# Altium PCB 2015_PerfServos.PcbDoc
Units mil, origin at the board's own origin, x right, y up, seen from the top; angles counter-clockwise.
Board outline 955 x 1895 mil, 4 copper layers (1-TOP, 2-Signal, 3-GND, 4-BOT); 26 components, 20 nets, 101 pads, 33 vias.
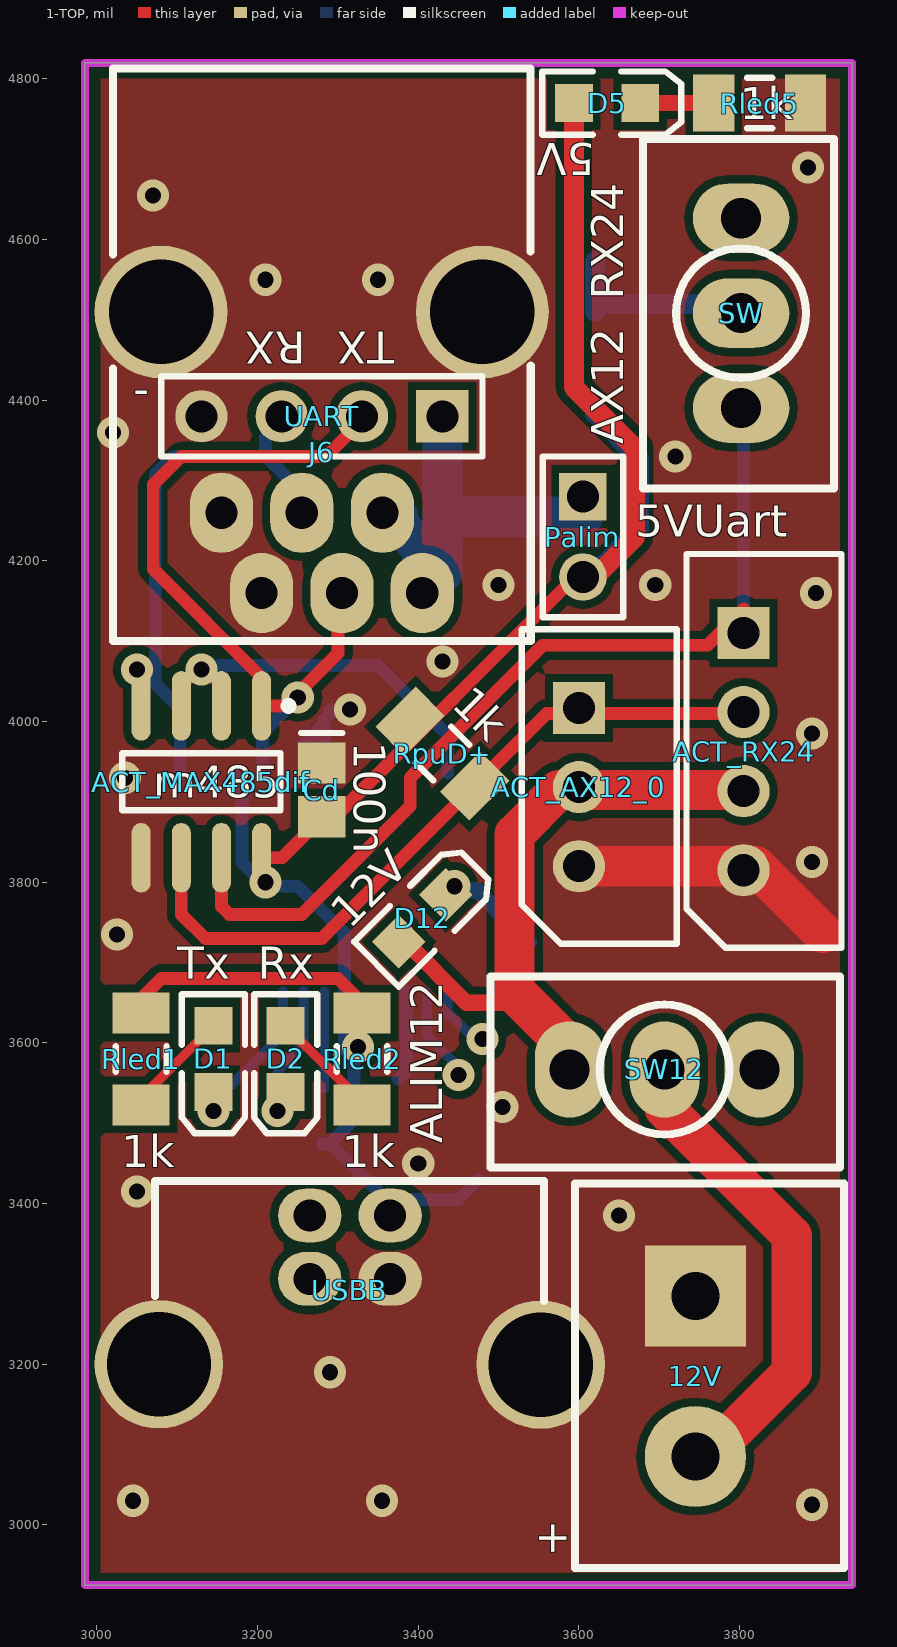
[diagram p0: 1-TOP view]
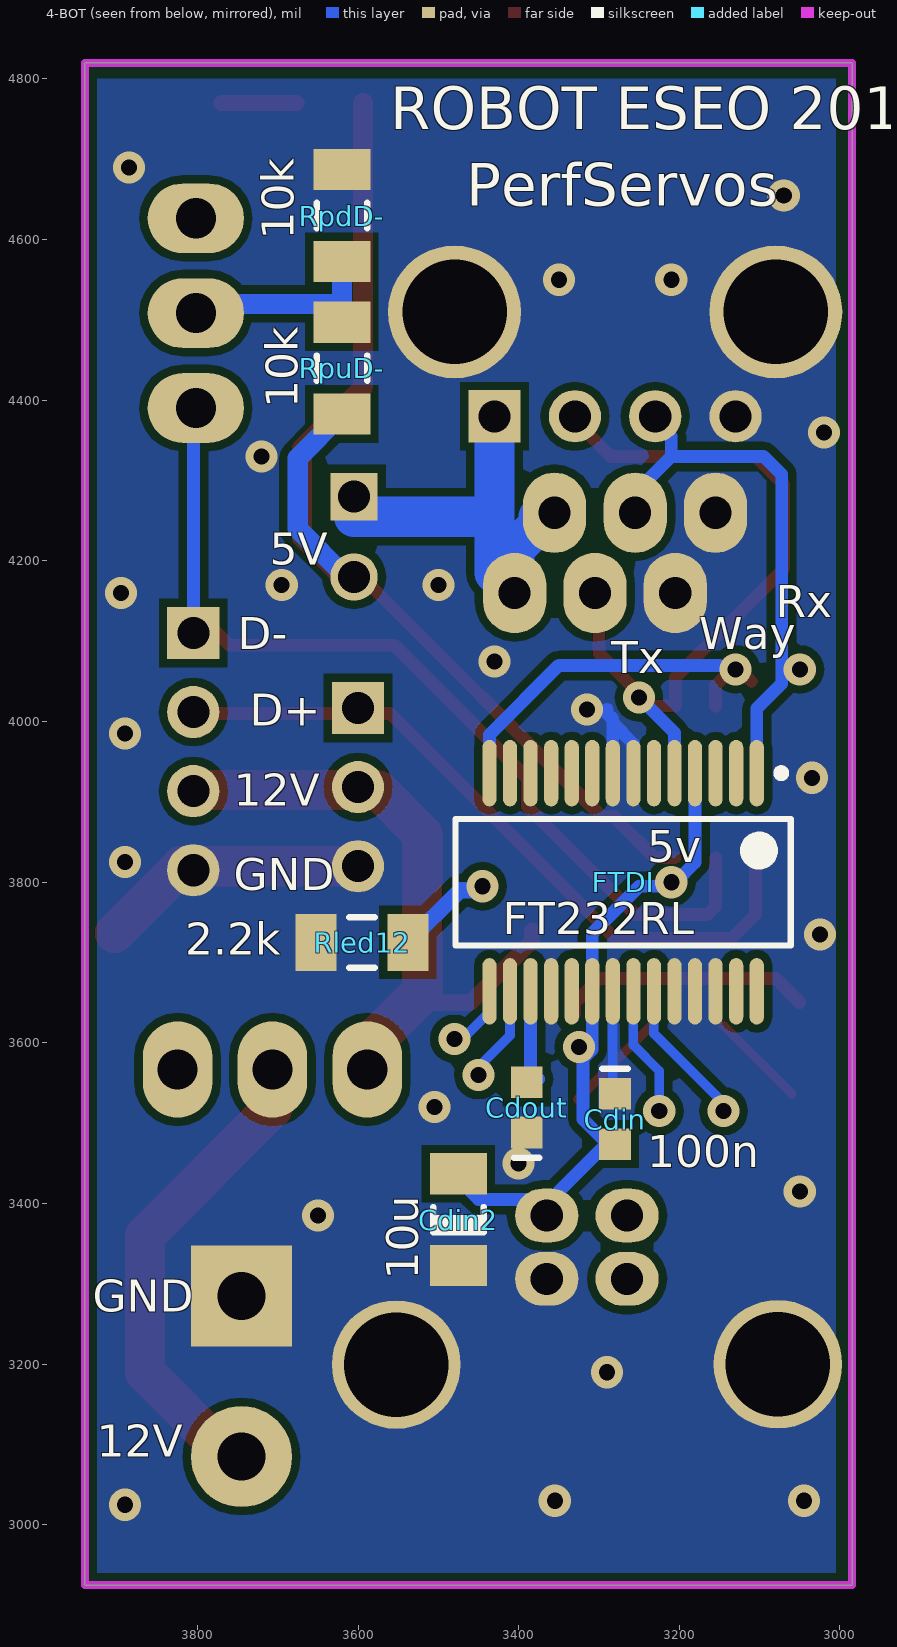
[diagram p1: 4-BOT view, seen from below]
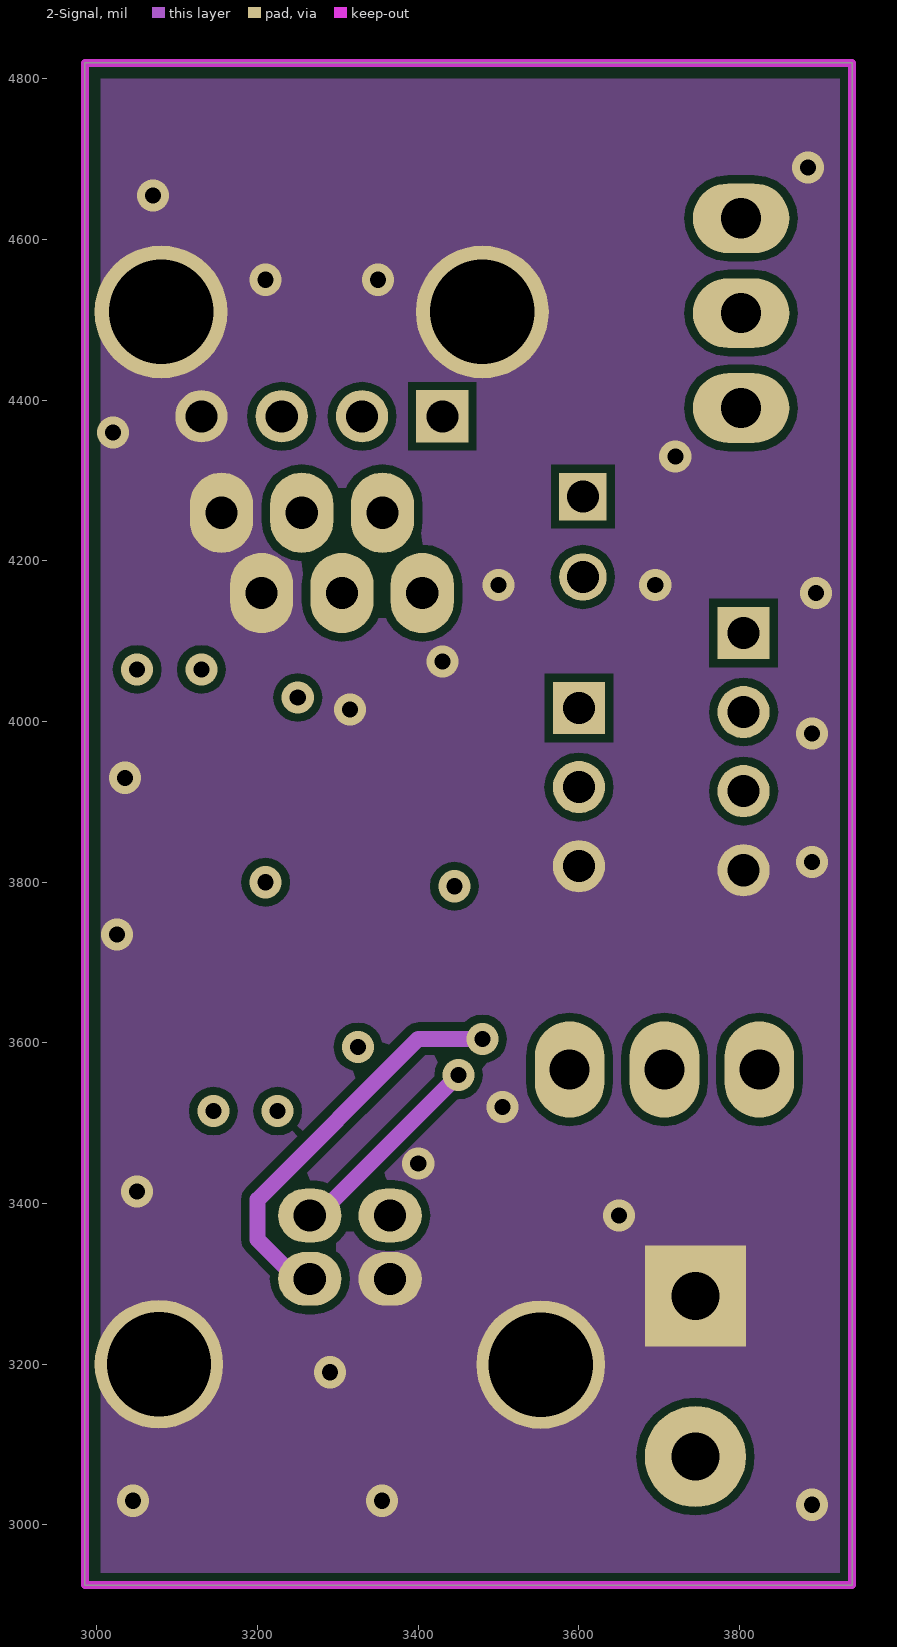
[diagram p2: 2-Signal]
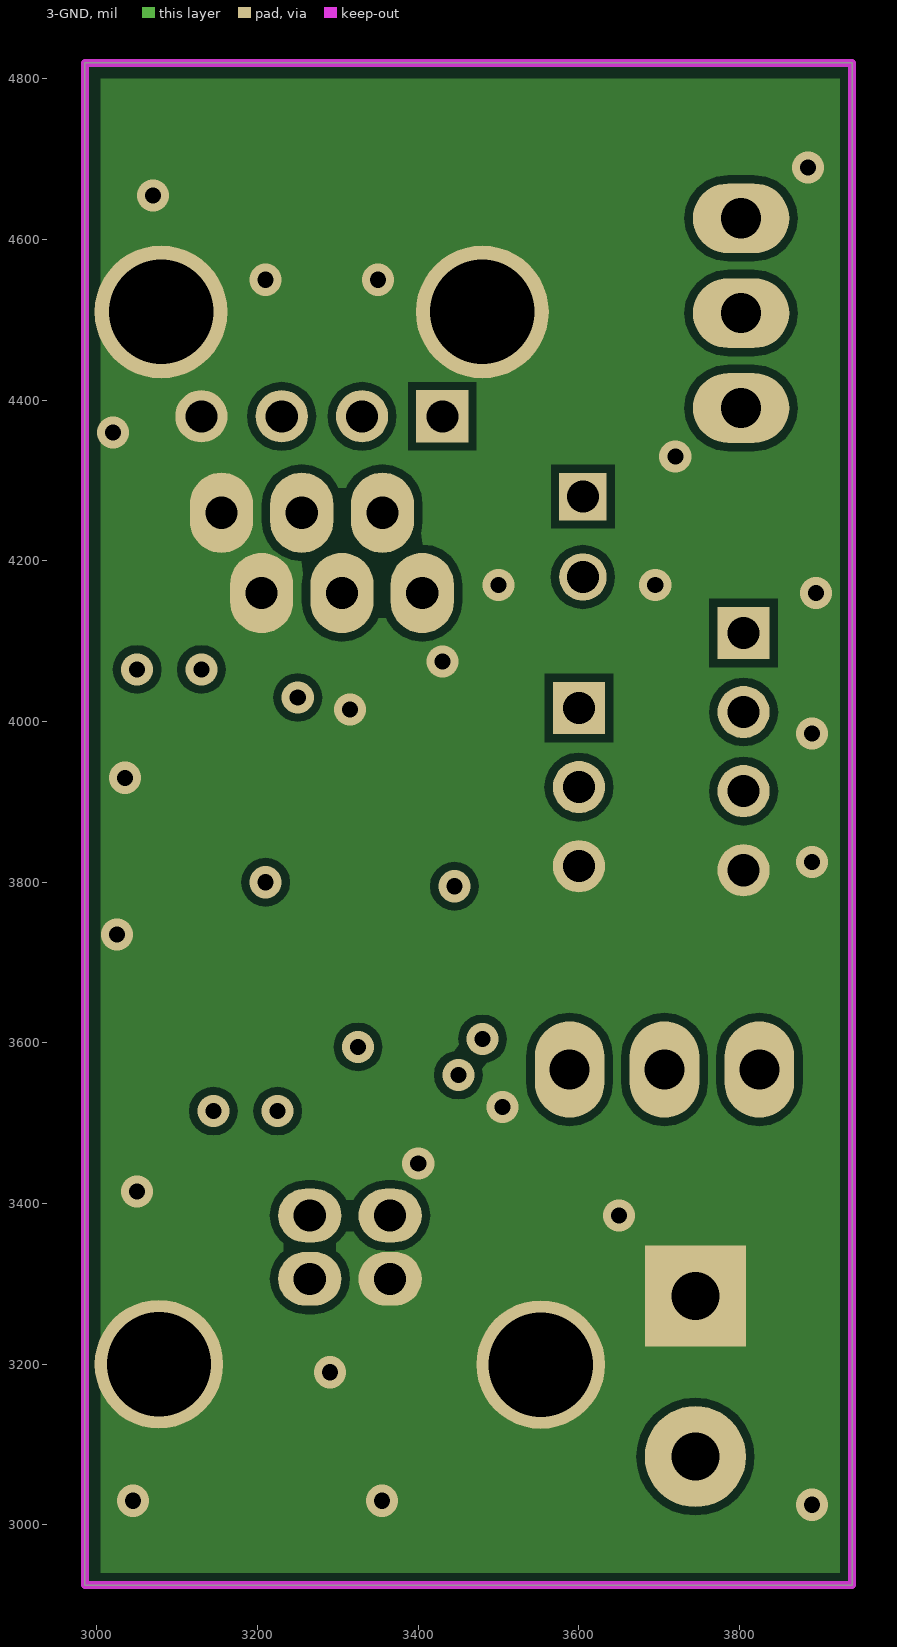
[diagram p3: 3-GND]
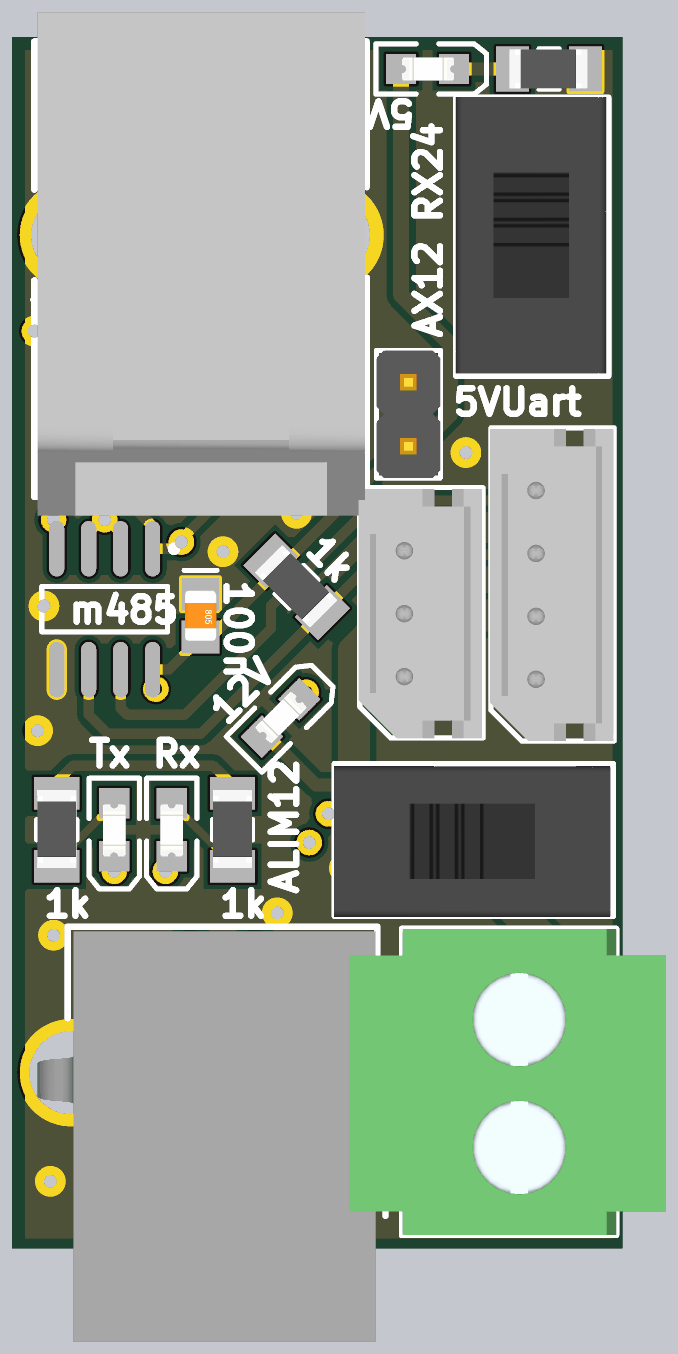
[diagram p4: 3D render of the assembled board from above, using the file's embedded part models]
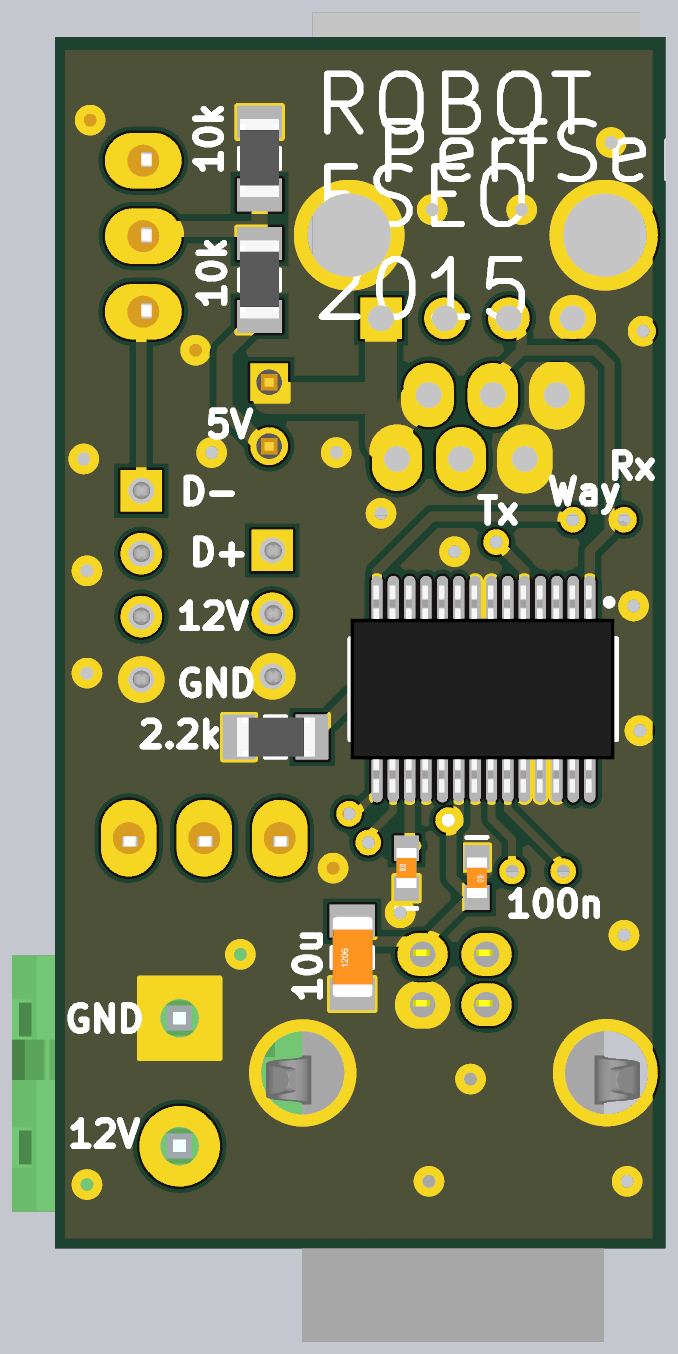
[diagram p5: 3D render of the assembled board from below, using the file's embedded part models]

## Layer stack, top to bottom
Top Solder: solder mask 0.4, Solder Resist, Dk 3.5
1-TOP: signal copper 1.4
Dielectric1: core 12.6, FR-4, Dk 4.8
2-Signal: signal copper 1.4
Dielectric2: prepreg 12.6, FR-4, Dk 4.8
3-GND: signal copper 1.4
Dielectric3: core 12.6, FR-4, Dk 4.8
4-BOT: signal copper 1.4
Bottom Solder: solder mask 0.4, Solder Resist, Dk 3.5

## Board outline
2985,2925 2985,4820 3940,4820 3940,2925

## Design rules (kind name [scope] priority, off if disabled: settings)
Clearance Clearance_1 [InNamedPolygon('4_GND') Or  InNamedPolygon('1_GND') Or  InNamedPolygon('3_GND') Or  InNamedPolygon('2_GND')] p1: gap=10
Clearance [All] p2: gap=7
Height [All] p1: minheight=0 maxheight=5000 prefheight=500
HoleSize [All] p1: absolutevalues=TRUE maxlimit=200 minlimit=1 maxpercent=80.000 minpercent=20.000
PolygonConnect [All] p1: connectstyle=Direct reliefconductorwidth=10 reliefentries=4 polygonreliefangle="90 Angle" airgapwidth=10
RoomDefinition 2015_PerfServos [InComponentClass('2015_PerfServos')] p1: confinementstyle=ConfineIn formatcopy=TRUE lockcomponents=FALSE outline 4600,2000 4000,2000 4000,2330 4600,2330
RoutingVias [All] p1: holewidth=28 width=50 viastyle="Through Hole" minholewidth=28 minwidth=50 maxholewidth=28 maxwidth=50
SilkToSolderMaskClearance SilkscreenOverComponentPads [IsPad] p1: minsilkscreentomaskgap=10 clearancetoexposedcopper=TRUE
SolderMaskExpansion [All] p1: expansion=4
Width [All] p1: maxlimit=100 minlimit=12 preferedwidth=16
26 further rules are at their usual default settings.

## Components (designator, comment, footprint, x,y, rotation, side; value= is the part's Value field where it differs from the comment)
12V "BORNIER2" BORNIER_2V_5.08MM 3745,3085 r90 top
ACT_AX12_0 "MOLEX 22-03-5035" MOLEX3_2.5MM 3600,3820 r90 top
ACT_MAX485dif "MAX485CPA+_DIP8" SO8_N 3130,3925 r270 top
ACT_RX24 "MOLEX 22-03-5045" MOLEX4_2.5MM 3805,3815 r90 top
Cd "100nF" C0805_N 3280,3915 r270 top
Cdin "100nF" C0603_N 3280,3505 r270 bottom
Cdin2 "10uF" C1206_N 3475,3380 r90 bottom
Cdout "100nF" C0603_N 3390,3520 r90 bottom
D1 "LED" LED_0805 3145,3580 r270 top
D2 "LED" LED_0805 3235,3580 r270 top
D5 "LED" LED_0805 3635,4770 r0 top
D12 "LED" LED_0805 3405,3755 r45 top
FTDI "IC_FT232RL" SSOP28_N 3270,3800 r270 bottom
J6 "UART" RJ11_6/6 3205,4160 r90 top
Palim "Jump" HDR1X2 3605,4280 r270 top
Rled1 "1K" R1206_N 3055,3580 r90 top
Rled2 "1K" R1206_N 3330,3580 r90 top
Rled5 "2,2k" R1206_N 3825,4770 r180 top
Rled12 "2,2k" R1206_N 3595,3725 r180 bottom
RpdD- "10k" R1206_N 3620,4630 r90 bottom
RpuD+ "10k" R1206_N 3430,3960 r135 top
RpuD- "10k" R1206_N 3620,4440 r90 bottom
SW "" "SW_UNIPOL_DROIT - Ebay - SPDT - 11x6x5" 3920,4725 r180 top
SW12 "" "SW_UNIPOL_DROIT - Ebay - SPDT - 11x6x5" 3490,3685 r270 top
UART "BARRETTE4" HDR1X4 3430,4380 r180 top
USBB "USB_B" USB_B_COUDE 3265,3385 r0 top

## Footprints (in the part's own frame and the unit in brackets; to place one, negate y for a bottom-side part, rotate by r counter-clockwise, add the part's x,y. Pads: shape width x height; smd on the part's side, far side on the other; paste and mask are expansions set on the pad)
BORNIER_2V_5.08MM [mm] "Connector; Header; 2 Position; screw terminal blocks, Pin Spacing=5.08mm"
  rect 3.2x3.2 hole 1.524: 1(5.08,0)
  round 3.2 hole 1.524: 2(0,0)
  silkscreen extent -3.53,-4.7 8.64,3.81, body extent -3.53,-6.68 8.63,5.92, height 29.9
C0603_N [mm] "Chip Capacitor, Body 1.6x0.8mm, IPC Medium Density"
  rect 1x1 smd: 1(-0.8,0) 2(0.787,0)
  silkscreen extent -1.6,-0.4 -1.6,0.4, body extent -0.8,-0.39 0.8,0.41, height 0.32
C0805_N [mm] "Chip Capacitor, Body 2.0x1.3mm, IPC Medium Density"
  rect 1.3x1.5 smd: 1(-0.85,0) 2(0.85,0)
  silkscreen extent -1.8,-0.65 -1.8,0.65, body extent -0.99,-0.63 1.01,0.63, height 0.8
C1206_N [mm] "Chip Capacitor, Body 3.2x1.6mm, IPC Medium Density"
  rect 1.3x1.8 smd: 1(-1.45,0) 2(1.45,0)
  silkscreen extent -0.4,-0.8 0.4,0.8, body extent -1.57,-0.81 1.63,0.79, height 1.02
HDR1X2 [mm]
  rect 1.5x1.5 hole 1.016: 1(0,0)
  round 1.5 hole 1.016: 2(2.54,0)
  silkscreen extent -1.27,-1.27 3.81,1.27, body extent -1.27,-1.27 3.81,1.27, height 10.1
HDR1X4 [mil] "Connector; Header; 4 Position"
  rect 65x65 hole 40: 1(0,0)
  round 65 hole 40: 2(100,0) 3(200,0) 4(300,0)
  silkscreen extent -50,-50 350,50
LED_0805 [mm] "SM LED; 2 Flat Leads"
  rect 1.2x1.2 smd: 1(-1.05,0) 2(1.05,0)
  silkscreen extent -2.05,-1 2.35,1, body extent -1.05,-0.64 1.06,0.64, height 1.2
MOLEX3_2.5MM [mil] "Ref Molex : 22-03-5035 - 3 voies - 2.5mm"
  rect 65x65 hole 40: 1(196.85,0)
  round 65 hole 40: 2(98.43,0) 3(0,0)
  silkscreen extent -96,-122 295,71, body extent -97,-120 293,73, height 233
MOLEX4_2.5MM [mil] "Ref Molex : 22-03-5045 - 4 voies - 2.5mm"
  rect 65x65 hole 40: 1(295.28,0)
  round 65 hole 40: 2(196.85,0) 3(98.43,0) 4(0,0)
  silkscreen extent -96,-122 394,71, body extent -96,-121 392,72, height 233
R1206_N [mm] "Chip Resistor, Body 3.2x1.6mm, IPC Medium Density"
  rect 1.3x1.8 smd: 1(-1.45,0) 2(1.45,0)
  silkscreen extent -0.4,-0.8 0.4,0.8, body extent -1.68,-0.87 1.68,0.87, height 0.71
RJ11_6/6 [mm] "Connector; RJ11; 6P/6C; Low Profil; Right Angle; Pin Spacing=2.54mm"
  oval 2.54x2 hole 1.016: 1(0,-5.08) 2(2.54,-3.82) 3(0,-2.54) 4(2.54,-1.27) 5(0,0) 6(2.54,1.27)
  round 4.2 hole 3.302: FIX1(8.89,3.18) FIX2(8.89,-6.98)
  silkscreen extent -1.51,-8.51 16.59,4.7, body extent -2.25,-8.43 17.75,4.57, height 16
SO8_N [mm] "SOIC, 8-Leads, Body 4.9x3.9mm, Pitch 1.27mm, IPC Medium Density"
  oval 2.2x0.6 smd: 1(-2.4,1.905) 2(-2.4,0.635) 3(-2.4,-0.635) 4(-2.4,-1.905) 5(2.4,-1.905) 6(2.4,-0.635) 7(2.4,0.635) 8(2.4,1.905)
  silkscreen extent -2.52,-2.5 0.9,2.88, body extent -2,-2.5 2,2.5, height 1.75
SSOP28_N [mm] "SOP, 28-Leads, Body 10.2x5.3mm, Pitch 0.65mm, IPC Medium Density"
  oval 2.1x0.45 smd: 1(-3.45,4.225) 2(-3.45,3.575) 3(-3.45,2.925) 4(-3.45,2.275) 5(-3.45,1.625) 6(-3.45,0.975) 7(-3.45,0.325) 8(-3.45,-0.325) 9(-3.45,-0.975) 10(-3.45,-1.625) 11(-3.45,-2.275) 12(-3.45,-2.925) 13(-3.45,-3.575) 14(-3.45,-4.225) 15(3.45,-4.225) 16(3.45,-3.575) 17(3.45,-2.925) 18(3.45,-2.275) 19(3.45,-1.625) 20(3.45,-0.975) 21(3.45,-0.325) 22(3.45,0.325) 23(3.45,0.975) 24(3.45,1.625) 25(3.45,2.275) 26(3.45,2.925) 27(3.45,3.575) 28(3.45,4.225)
  silkscreen extent -3.57,-5.3 2,5.3, body extent -4.11,-5.3 4.11,5.3, height 1.99
"SW_UNIPOL_DROIT - Ebay - SPDT - 11x6x5" [mm] "SW_UNIPOL_DROIT - Ebay - SPDT - 11x6x5"
  oval 3.048x2.2 hole 1.27: COMMON1(3,5.5) NC1(3,8.5) NO1(3,2.5)
  silkscreen extent 0.06,0 6.1,11.05, body extent 0.13,-0.04 6.13,10.96, height 8
USB_B_COUDE [mm] "Connector; USB; type B; 4 Position; Pin Spacing=2.54mm/12.07mm"
  oval 2x1.7 hole 1.016: 1(2.54,0) 2(0,0) 3(0,-2) 4(2.54,-2)
  round 4.064 hole 3.302: FIX1(-4.77,-4.7) FIX2(7.3,-4.71)
  silkscreen extent -4.9,-2.7 7.4,1.1, body extent -6.1,-15.39 8.76,0.91, height 10.75

## Part data
12V: "Terminal blocks, 2 pins, pitch=5mm"
ACT_AX12_0: library part BARRETTE3, "Header, 3-Pin"
ACT_MAX485dif: "EMETTEUR/RECEPTEUR FAIBLE PUISSANCE DE LIAISONS RS422/RS485 - DIP8"
ACT_RX24: library part BARRETTE4, "Header, 4-Pin"
Cd: library part Condensateur, "Capacitor"
Cdin Cdin2 Cdout: library part Capacitor, "Capacitor"
D1 D2 D5 D12: "Typical LED"
FTDI: "FT232R USB UART"
J6: library part CONNECTEUR_RJ12
Palim: library part "Jumper SIP2.54", "Jumper SIP2.54"
Rled1 Rled2 Rled5 Rled12 RpdD- RpuD+ RpuD-: library part Resistor, "Resistor"
SW SW12: library part "SW SPDT- APEM Série 523x", "Switch unipolaire a levier"
UART: "Header, 4-Pin"

## Via types
v1: diameter 40, hole 20, 1-TOP to 4-BOT, 33 vias

## Nets (pads, with @x,y where several pads share a name; then routed paths per layer and width w, separated by ;. In a path a pad name is that pad's centre, name@x,y a point inside that pad or via, vN(x,y) a via of type N, cw(c..) or ccw(c..) an arc to the next point about the centre after c; other vN are vias at no path point)
5V: ACT_MAX485dif.8 Cd.2 Cdin2.2 Cdin.2 D5.1 FTDI.4 FTDI.20 Palim.2 Rled1.2 Rled2.2 RpuD+.2 RpuD-.1 USBB.1 | length 2534.1
  1-TOP w16: Rled1.2@3050,3650 3080,3680 3300,3680 3330,3650 Rled2.2 ; ACT_MAX485dif.8 3230.51,3830.51 Cd.2@3275,3875 ; Cd.2 3296.54,3881.54 3595,4180 Palim.2 Palim.2@3615,4180
  1-TOP w25: D5.1 3593.66,4416.34 3670,4340 3670,4230 Palim.2@3620,4180
  4-BOT w16: FTDI.4 3180.43,3824.57 v1@3205,3800 ; v1@3215,3795 3250,3795 3308.39,3736.61 FTDI.20 3308.39,3591.61 3320,3580 3320,3505 Cdin.2@3290,3475 ; Cdin.2 3291,3474 3360,3405 3450,3405 Cdin2.2@3475,3430
  4-BOT w25: Palim.2@3615,4180 3675,4240 3675,4327.91 RpuD-.1
  other v1: 3325,3595 3210,3800
12V: ACT_AX12_0.2 ACT_RX24.3 D12.1 SW12.NO1 | length 894.9
  1-TOP w20: D12.1@3383.66,3740 3383.66,3726.34 3460,3650 3510,3650 SW12.NO1@3580,3580
  1-TOP w50: SW12.NO1 3588.43,3596.57 3520,3665 3520,3860 3575,3915 ACT_RX24.3@3800,3915
12VIN: 12V.2 SW12.COMMON1 | length 576.9
  1-TOP w50: SW12.COMMON1 3706.54,3518.46 3865,3360 3865,3190 12V.2@3770,3095
D+: FTDI.15 USBB.3 | length 570.8
  2-Signal w20: USBB.3@3250,3305 3200,3355 3200,3405 3400,3605 v1(3480,3605)
  4-BOT w12: FTDI.15 3436.34,3638.66 v1@3480,3595
D-: FTDI.16 USBB.2 | length 343.8
  2-Signal w20: USBB.2@3280,3390 v1(3450,3560)
  4-BOT w12: FTDI.16 3410.75,3609.25 v1@3445,3575
GND: 12V.1 ACT_AX12_0.3 ACT_MAX485dif.5 ACT_RX24.4 Cd.1 Cdin2.1 Cdin.1 Cdout.1 FTDI.7 FTDI.8 FTDI.18 FTDI.21 FTDI.24 FTDI.25 FTDI.26 J6.5 J6.6 J6.FIX1 J6.FIX2 Rled5.1 Rled12.1 RpdD-.2 UART.4 USBB.4 USBB.FIX1 USBB.FIX2 | length 613.5
  1-TOP w50: ACT_AX12_0.3 3820,3820 3903,3737
  4-BOT w12: Cdin.1@3282.8,3542.8 FTDI.21
  4-BOT w16: FTDI.7 3257.2,3972.2 3282.8,3997.8 ; FTDI.8 3282.8,3997.8 ; 3290,4015 3290,4010 3282.8,4002.8 3282.8,3997.8
  other v1: 3890,3025 3045,3030 3355,3030 3290,3190 3650,3385 3050,3415 3400,3450 3505,3520 3025,3735 3890,3825 3035,3930 3890,3985 3315,4015 3430,4075 3895,4160 3500,4170 3695,4170 3720,4330 3020,4360 3210,4550 3350,4550 3070,4655 3885,4690
LED_RX: D2.2 FTDI.22 | length 157.5
  4-BOT w12: v1@3225,3520 3225,3565 3257.2,3597.2 FTDI.22
  other v1: 3225,3515
LED_TX: D1.2 FTDI.23 | length 175
  4-BOT w12: v1@3145,3525 3231.61,3611.61 FTDI.23
  other v1: 3145,3515
MAX_RX: ACT_MAX485dif.4 FTDI.1 J6.4 UART.3 | length 634.2
  4-BOT w16: FTDI.1 3103.66,4016.34 3072.5,4047.5 3072.5,4307.5 3095,4330 3210,4330 ; UART.3@3230,4375 3210,4355 3210,4330 ; J6.4@3245,4295 3210,4330
  other v1: 3050,4065
MAX_SENS: ACT_MAX485dif.2 ACT_MAX485dif.3 FTDI.14 | length 450.8
  1-TOP w16: ACT_MAX485dif.3@3110,4050 3120,4060 3140,4060 3155,4045 ACT_MAX485dif.2
  4-BOT w16: 3150,4070 3350,4070 3436.34,3983.66 FTDI.14
  other v1: 3130,4065
MAX_TX: ACT_MAX485dif.1 FTDI.5 J6.3 UART.2 | length 927
  1-TOP w16: J6.3@3300,4160 3300,4085 3234.49,4019.49 ACT_MAX485dif.1 3205,4055 3070,4190 3070,4295 3105,4330 3285,4330 UART.2@3325,4370
  4-BOT w16: FTDI.5 3206.02,3986.02 v1(3250,4030)
MAXD+: ACT_AX12_0.1 ACT_MAX485dif.6 ACT_RX24.2 RpuD+.1 | length 903.9
  1-TOP w16: ACT_MAX485dif.6 3105,3760 3135,3730 3280,3730 3560,4010 ACT_RX24.2@3810,4010
MAXD-: ACT_MAX485dif.7 ACT_RX24.1 SW.NC1 | length 1152.6
  1-TOP w16: ACT_MAX485dif.7 3155,3770 3165,3760 3255,3760 3390,3895 3390,3930 3555,4095 3760,4095 ACT_RX24.1@3805,4140
  4-BOT w16: ACT_RX24.1@3805,4140 SW.NC1@3805,4400
NetCdout_2: Cdout.2 FTDI.17 | length 113.4
  4-BOT w16: Cdout.2@3375,3555 3385.16,3565.16 FTDI.17
NetD1_1: D1.1 Rled1.1 | length 120.2
  1-TOP w12: Rled1.1@3060,3536.34 D1.1
NetD2_1: D2.1 Rled2.1 | length 129.2
  1-TOP w12: D2.1 Rled2.1@3326.34,3530
NetD5_2: D5.2 Rled5.2 | length 93.7
  1-TOP w20: D5.2 Rled5.2@3770,4770
NetD12_2: D12.2 Rled12.2 | length 114.8
  4-BOT w20: v1@3450,3790 3472.91,3790 Rled12.2
  other v1: 3445,3795
NetRpdD-_1: RpdD-.1 RpuD-.2 SW.COMMON1 | length 247.1
  4-BOT w25: RpdD-.1 3620,4510 3630,4520 SW.COMMON1@3800,4520
VDD_CARTE: J6.1 J6.2 Palim.1 UART.1 | length 507.8
  4-BOT w50: J6.2@3360,4255 J6.2@3365,4250 ; J6.2@3370,4255 J6.2@3375,4255 ; J6.2@3375,4245 3405,4215 J6.1 ; J6.1@3410,4165 3430,4185 3430,4255 ; UART.1 3430,4255 ; Palim.1@3605,4255 3430,4255
pads on no net: FTDI.2 FTDI.3 FTDI.6 FTDI.9 FTDI.10 FTDI.11 FTDI.12 FTDI.13 FTDI.19 FTDI.27 FTDI.28 SW12.NC1 SW.NO1

## Polygon pours and split planes (outlines as drawn)
GND on 4-BOT "4_GND" (solid, pour order 8): 3005,4800 3925,4800 3925,2940 3005,2940
GND on 3-GND "3_GND" (solid, pour order 9): 3005,4800 3925,4800 3925,2940 3005,2940
GND on 2-Signal "2_GND" (solid, pour order 10): 3005,4800 3925,4800 3925,2940 3005,2940
GND on 1-TOP "1_GND" (solid, pour order 11): 3005,4800 3925,4800 3925,2940 3005,2940

## Keep-outs
Keep-Out Layer:
  the board outline again, w10

## Silkscreen, mask and mechanical layers (free items; w line width, h text height)
Top Overlay:
  text "1k" at 3800,4750 h40
  text "5V" at 3620,4720 h40 r180
  text "RX24" at 3655,4525 h40 r90
  text "RX" at 3260,4485 h40 r180
  text "TX" at 3370,4485 h40 r180
  text "-" at 3065,4425 h40 r180
  text "AX12" at 3655,4345 h40 r90
  text "5VUart" at 3670,4230 h40
  text "1k" at 3440,4020 h40 r315
  text "100n" at 3320,3975 h40 r270
  text "m485" at 3070,3905 h40
  text "12V" at 3315,3740 h40 r45
  text "Tx" at 3100,3680 h40
  text "Rx" at 3200,3680 h40
  text "ALIM12" at 3430,3475 h40 r90
  text "1k" at 3030,3445 h40
  text "1k" at 3305,3445 h40
  text "+" at 3585,2960 h40 r90
Bottom Overlay:
  text "ROBOT ESEO 2015" at 3560,4720 h90
  text "PerfServos" at 3465,4625 h90
  text "10k" at 3680,4600 h40 r270
  text "10k" at 3675,4390 h40 r270
  text "5V" at 3710,4195 h40
  text "Rx" at 3080,4130 h40
  text "Way" at 3175,4090 h40
  text "D-" at 3750,4090 h40
  text "Tx" at 3285,4060 h40
  text "D+" at 3735,3995 h40
  text "12V" at 3755,3895 h40
  text "5v" at 3240,3825 h40
  text "GND" at 3755,3790 h40
  text "FT232RL" at 3420,3735 h40
  text "2.2k" at 3815,3710 h40
  text "100n" at 3240,3445 h40
  text "10u" at 3525,3305 h40 r270
  text "GND" at 3930,3265 h40
  text "12V" at 3925,3085 h40